# Altium PCB FDD+3s.PcbDoc
Units mm, origin at the board's own origin, x right, y up, seen from the top; angles counter-clockwise.
Board outline 101.6 x 73.66 mm, 2 copper layers (Top, Bottom), stack 1.67 mm thick; 38 components, 95 nets, 309 pads, 0 vias.
Unrouted connection lines stored in the file: 180.
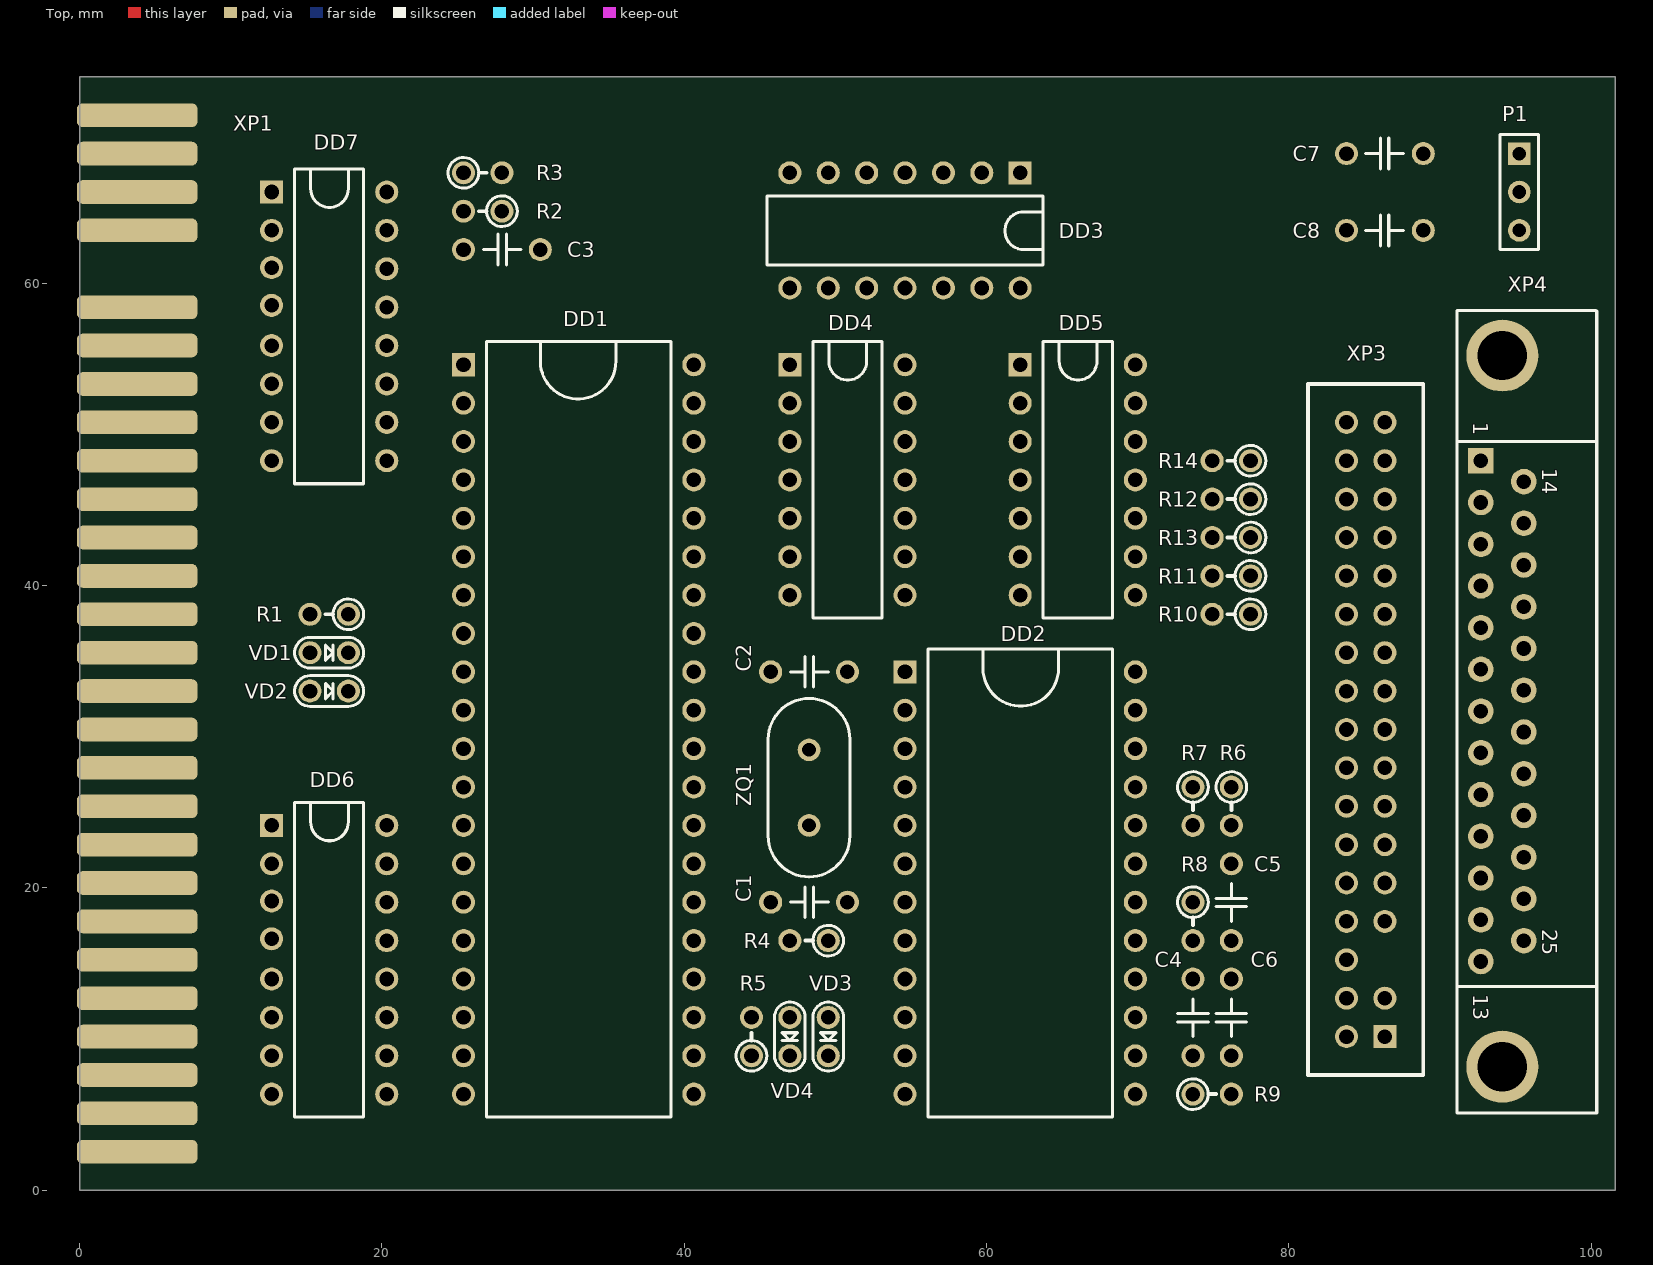
[diagram p0: Top view]
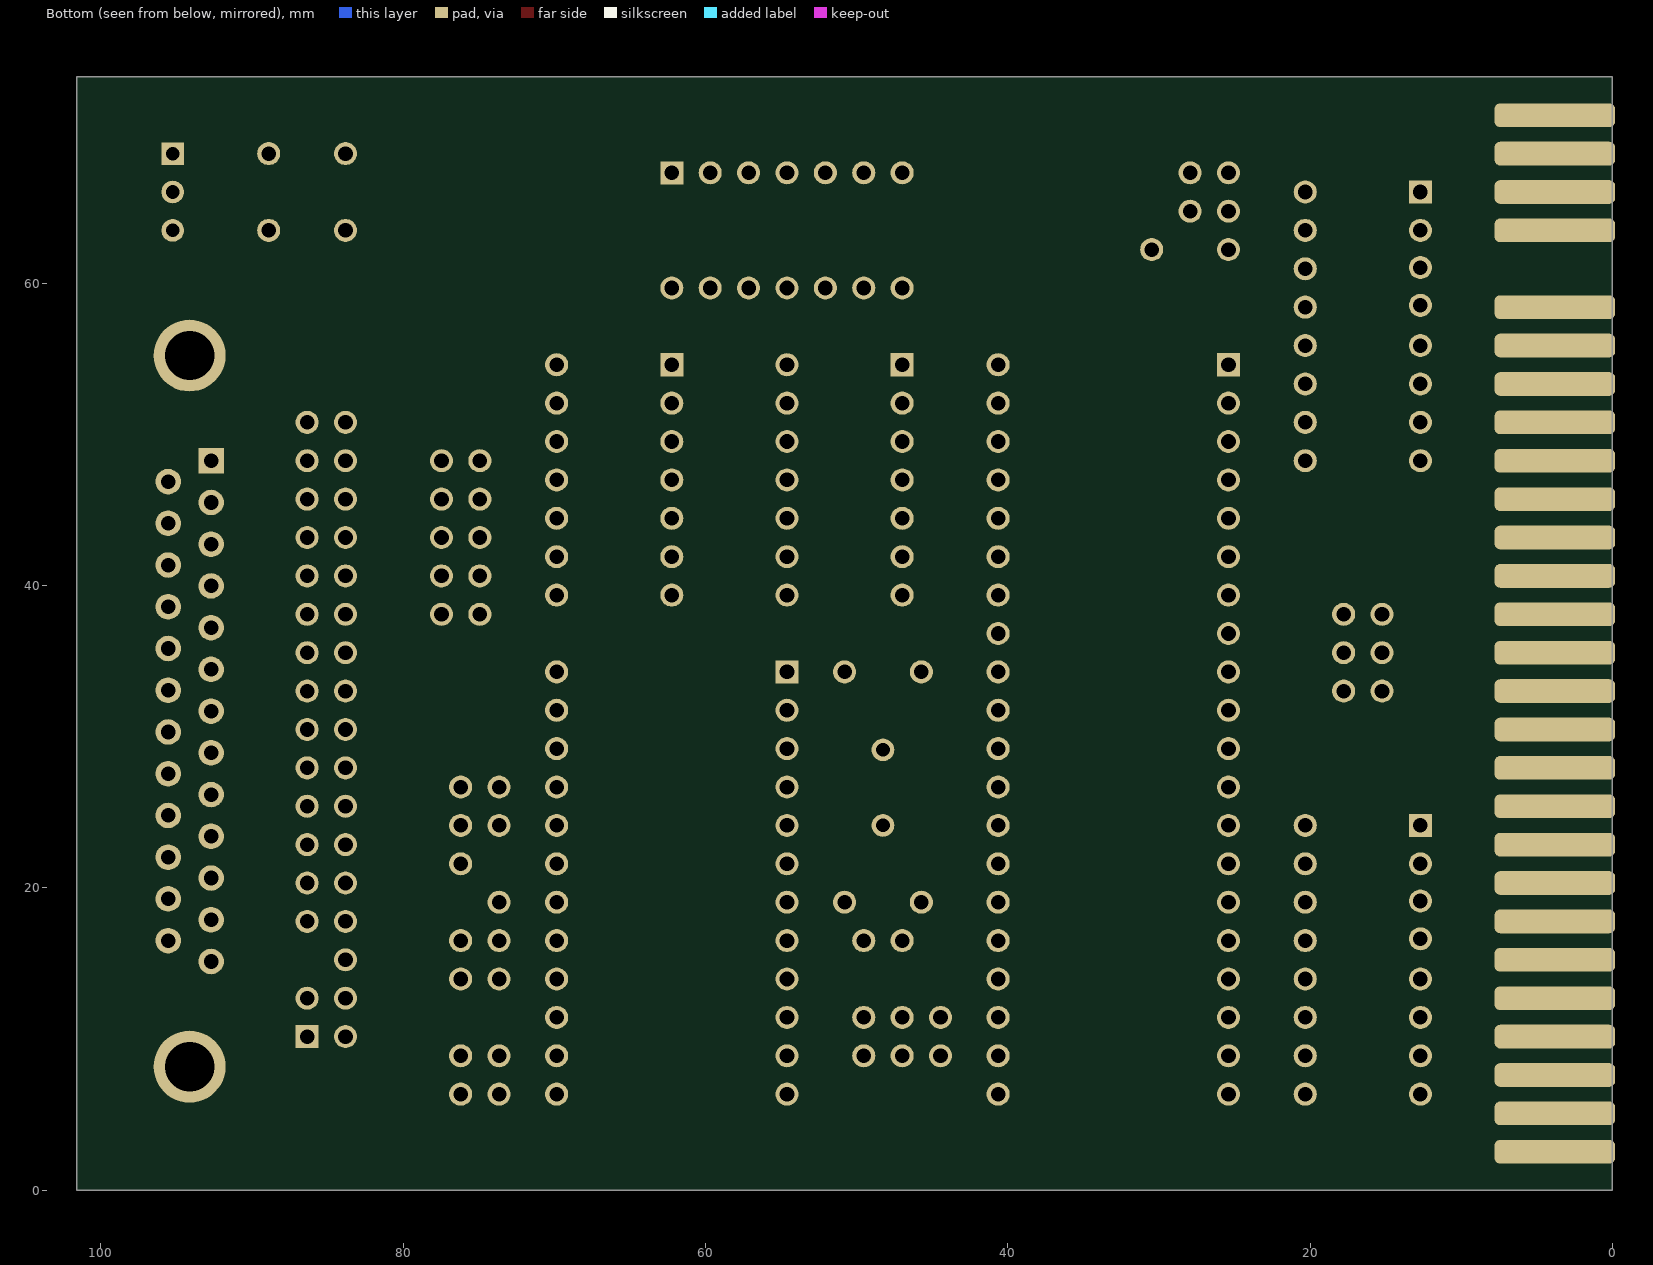
[diagram p1: Bottom view, seen from below]

## Layer stack, top to bottom
Top Solder: solder mask 0.01, Solder Resist, Dk 3.5
Top: signal copper 0.035
Dielectric 1: dielectric 1.6, FR-4, Dk 4.8
Bottom: signal copper 0.035
Bottom Solder: solder mask 0.01, Solder Resist, Dk 3.5

## Board outline
0,73.66 101.6,73.66 101.6,0 0,0

## Design rules (kind name [scope] priority, off if disabled: settings)
Clearance [All] p1: gap=0.2 except(0.5: Arc-Poly Track-Poly SMDPad-Poly THPad-Poly Via-Poly Fill-Poly Poly-Poly)
ComponentClearance DG126 [HasFootprint('DG126') vs HasFootprint('DG126')] p1: gap=-1 collisioncheckmode=3 verticalgap=0.2 showdistances=FALSE
ComponentClearance [All] p2: gap=0.3 collisioncheckmode=3 verticalgap=0.2 showdistances=FALSE
HoleSize [All] p1: absolutevalues=TRUE maxlimit=6.3 minlimit=0.2 maxpercent=80.000 minpercent=20.000
HoleToHoleClearance [All] p1: gap=0.4 allowstackedmicrovias=TRUE
MinimumSolderMaskSliver [All] p1: minsoldermaskwidth=0.1
PlaneConnect Via_Plane_Connect [(ObjectKind = 'Via')] p1: planeconnectstyle=Direct reliefexpansion=0.508 reliefentries=4 reliefconductorwidth=0.254 reliefairgap=0.254
PlaneConnect [All] p2: planeconnectstyle=Relief reliefexpansion=0.508 reliefentries=4 reliefconductorwidth=0.254 reliefairgap=0.254
PolygonConnect Via_Poly_Connect [(ObjectKind = 'Via')] p1: connectstyle=Direct reliefconductorwidth=0.254 reliefentries=4 polygonreliefangle="90 Angle" airgapwidth=0.254
PolygonConnect [All] p2: connectstyle=Relief reliefconductorwidth=0.254 reliefentries=4 polygonreliefangle="90 Angle" airgapwidth=0.254
RoutingVias [All] p1: holewidth=0.6 width=1 viastyle="Through Hole" minholewidth=0.3 minwidth=0.6 maxholewidth=1.6 maxwidth=2
SilkToSilkClearance [All] p1: silktosilkclearance=0.1
SilkToSolderMaskClearance [IsPad] p1: minsilkscreentomaskgap=0.1 clearancetoexposedcopper=TRUE
SolderMaskExpansion [All] p1: expansion=0.102
Width [All] p1: maxlimit=0.6 minlimit=0.3 preferedwidth=0.4 minimp=50.000000 maximp=50.000000 favimp=50.000000
23 further rules are at their usual default settings.

## Components (designator, comment, footprint, x,y, rotation, side; value= is the part's Value field where it differs from the comment)
C1 "K10-17_75" K10-17_75 50.8,19.05 r180 top
C2 "K10-17_75" K10-17_75 50.8,34.29 r180 top
C3 "K10-17_75" K10-17_75 30.48,62.23 r180 top
C4 "K10-17_75" K10-17_75 73.66,8.89 r90 top
C5 "K10-17_75" K10-17_75 76.2,16.51 r90 top
C6 "K10-17_75" K10-17_75 76.2,8.89 r90 top
C7 "K10-17_75" K10-17_75 83.82,68.58 r0 top
C8 "K10-17_75" K10-17_75 83.82,63.5 r0 top
DD1 "UPD765" DIP40_15 25.4,54.61 r0 top
DD2 "SED9420" DIP24_15 54.61,34.29 r0 top
DD3 "1533LN1" DIP14 62.23,67.31 r270 top
DD4 "1533LA3" DIP14 46.99,54.61 r0 top
DD5 "1533LN1" DIP14 62.23,54.61 r0 top
DD6 "1533ID7" DIP16 12.7,24.13 r0 top
DD7 "1533TM8" DIP16 12.7,66.04 r0 top
P1 "Power" HDR1X3 95.25,68.58 r270 top
R1 "R0125-2_5" R0125-2_5 15.24,38.1 r0 top
R2 "R0125-2_5" R0125-2_5 25.4,64.77 r0 top
R3 "R0125-2_5" R0125-2_5 27.94,67.31 r180 top
R4 "R0125-2_5" R0125-2_5 46.99,16.51 r0 top
R5 "R0125-2_5" R0125-2_5 44.45,11.43 r270 top
R6 "R0125-2_5" R0125-2_5 76.2,24.13 r90 top
R7 "R0125-2_5" R0125-2_5 73.66,24.13 r90 top
R8 "R0125-2_5" R0125-2_5 73.66,16.51 r90 top
R9 "R0125-2_5" R0125-2_5 76.2,6.35 r180 top
R10 "R0125-2_5" R0125-2_5 74.93,38.1 r0 top
R11 "R0125-2_5" R0125-2_5 74.93,40.64 r0 top
R12 "R0125-2_5" R0125-2_5 74.93,45.72 r0 top
R13 "R0125-2_5" R0125-2_5 74.93,43.18 r0 top
R14 "R0125-2_5" R0125-2_5 74.93,48.26 r0 top
VD1 "KD522-2_5" KD522-2_5 15.24,35.56 r0 top
VD2 "KD522-2_5" KD522-2_5 15.24,33.02 r0 top
VD3 "KD522-2_5" KD522-2_5 49.53,11.43 r270 top
VD4 "KD522-2_5" KD522-2_5 46.99,11.43 r270 top
XP1 "ZX EDGE" ZX_EDGE 3.81,71.12 r0 top
XP3 "FDD_CON" FDD_CON_Male 86.36,10.16 r180 top
XP4 "FDD_DB25" DSUB1.385-2H25A 92.71,48.26 r270 top
ZQ1 "RK169MD" RK169MD 48.26,24.13 r90 top

## Footprints (in the part's own frame and the unit in brackets; to place one, negate y for a bottom-side part, rotate by r counter-clockwise, add the part's x,y. Pads: shape width x height; smd on the part's side, far side on the other; paste and mask are expansions set on the pad)
DIP14 [mil]
  rect 60x60 hole 38: 1(0,0)
  round 60 hole 38: 2(0,-100) 3(0,-200) 4(0,-300) 5(0,-400) 6(0,-500) 7(0,-600) 8(300,-600) 9(300,-500) 10(300,-400) 11(300,-300) 12(300,-200) 13(300,-100) 14(300,0)
  silkscreen extent 60,-660 240,60
DIP16 [mil]
  rect 60x60 hole 38: 1(0,0)
  round 60 hole 38: 2(0,-100) 3(0,-196.85) 4(0,-295.28) 5(0,-400) 6(0,-500) 7(0,-600) 8(0,-700) 9(300,-700) 10(300,-600) 11(300,-500) 12(300,-400) 13(300,-300) 14(300,-200) 15(300,-100) 16(300,0)
  silkscreen extent 60,-760 240,60
DIP24_15 [mil]
  rect 60x60 hole 38: 1(0,0)
  round 60 hole 38: 2(0,-100) 3(0,-200) 4(0,-300) 5(0,-400) 6(0,-500) 7(0,-600) 8(0,-700) 9(0,-800) 10(0,-900) 11(0,-1000) 12(0,-1100) 13(600,-1100) 14(600,-1000) 15(600,-900) 16(600,-800) 17(600,-700) 18(600,-600) 19(600,-500) 20(600,-400) 21(600,-300) 22(600,-200) 23(600,-100) 24(600,0)
  silkscreen extent 60,-1160 540,60
DIP40_15 [mil]
  rect 60x60 hole 38: 1(0,0)
  round 60 hole 38: 2(0,-100) 3(0,-200) 4(0,-300) 5(0,-400) 6(0,-500) 7(0,-600) 8(0,-700) 9(0,-800) 10(0,-900) 11(0,-1000) 12(0,-1100) 13(0,-1200) 14(0,-1300) 15(0,-1400) 16(0,-1500) 17(0,-1600) 18(0,-1700) 19(0,-1800) 20(0,-1900) 21(600,-1900) 22(600,-1800) 23(600,-1700) 24(600,-1600) 25(600,-1500) 26(600,-1400) 27(600,-1300) 28(600,-1200) 29(600,-1100) 30(600,-1000) 31(600,-900) 32(600,-800) 33(600,-700) 34(600,-600) 35(600,-500) 36(600,-400) 37(600,-300) 38(600,-200) 39(600,-100) 40(600,0)
  silkscreen extent 60,-1960 540,60
DSUB1.385-2H25A [mm] "Connector; D Subminiature; 25 Position; Right Angle; Pitch 1.385 mm"
  rect 1.69x1.69 hole 0.965: 1(0,0)
  round 1.69 hole 0.965: 2(2.761,0) 3(5.522,0) 4(8.283,0) 5(11.044,0) 6(13.805,0) 7(16.566,0) 8(19.327,0) 9(22.088,0) 10(24.849,0) 11(27.61,0) 12(30.371,0) 13(33.132,0) 14(1.381,2.84) 15(4.142,2.84) 16(6.903,2.84) 17(9.664,2.84) 18(12.424,2.84) 19(15.185,2.84) 20(17.946,2.84) 21(20.707,2.84) 22(23.469,2.84) 23(26.23,2.84) 24(28.991,2.84) 25(31.752,2.84)
  round 4.76 hole 3.26: 26(-6.96,1.42) 27(40.092,1.42)
  silkscreen extent -9.93,-1.58 43.17,7.67
FDD_CON_Male [mil]
  rect 60x60 hole 37.99: 1(0,0)
  round 60 hole 37.99: 2(100,0) 3(0,-100) 4(100,-100) 6(100,-200) 7(0,-300) 8(100,-300) 9(0,-400) 10(100,-400) 11(0,-500) 12(100,-500) 13(0,-600) 14(100,-600) 15(0,-700) 16(100,-700) 17(0,-800) 18(100,-800) 19(0,-900) 20(100,-900) 21(0,-1000) 22(100,-1000) 23(0,-1100) 24(100,-1100) 25(0,-1200) 26(100,-1200) 27(0,-1300) 28(100,-1300) 29(0,-1400) 30(100,-1400) 31(0,-1500) 32(100,-1500) 33(0,-1600) 34(100,-1600)
  silkscreen extent -100,-1700 200,100
HDR1X3 [mm] "Connector; Header; 3 Position"
  rect 1.5x1.5 hole 0.9: 1(0,0)
  round 1.5 hole 0.9: 2(2.54,0) 3(5.08,0)
  silkscreen extent -1.27,-1.27 6.35,1.27
K10-17_75 [mil]
  round 60 hole 38: 1(0,0) 2(200,0)
  silkscreen extent 50,-40 148,40
KD522-2_5 [mil]
  round 60 hole 38: 1(0,0) 2(100,0)
  silkscreen extent -40,-40 140,40
R0125-2_5 [mil]
  round 60 hole 38: 1(0,0) 2(100,0)
  silkscreen extent 40,-40 140,40
RK169MD [mm]
  round 1.5 hole 0.9: 1(0,0) 2(5,0)
  silkscreen extent -3.4,-2.7 8.4,2.7
ZX_EDGE [mm]
  rrect50% 8x1.57 smd far side: 1(0,0) 2(0,-2.54) 3(0,-5.08) 4(0,-7.62) 6(0,-12.7) 7(0,-15.24) 8(0,-17.78) 9(0,-20.32) 10(0,-22.86) 11(0,-25.4) 12(0,-27.94) 13(0,-30.48) 14(0,-33.02) 15(0,-35.56) 16(0,-38.1) 17(0,-40.64) 18(0,-43.18) 19(0,-45.72) 20(0,-48.26) 21(0,-50.8) 22(0,-53.34) 23(0,-55.88) 24(0,-58.42) 25(0,-60.96) 26(0,-63.5) 27(0,-66.04) 28(0,-68.58)
  rrect50% 8x1.57 smd: 29(0,0) 30(0,-2.54) 31(0,-5.08) 32(0,-7.62) 34(0,-12.7) 35(0,-15.24) 36(0,-17.78) 37(0,-20.32) 38(0,-22.86) 39(0,-25.4) 40(0,-27.94) 41(0,-30.48) 42(0,-33.02) 43(0,-35.56) 44(0,-38.1) 45(0,-40.64) 46(0,-43.18) 47(0,-45.72) 48(0,-48.26) 49(0,-50.8) 50(0,-53.34) 51(0,-55.88) 52(0,-58.42) 53(0,-60.96) 54(0,-63.5) 55(0,-66.04) 56(0,-68.58)

## Part data
P1: library part "Header 3", "Header, 3-Pin"

## Nets (pads, with @x,y where several pads share a name; then routed paths per layer and width w, separated by ;. In a path a pad name is that pad's centre, name@x,y a point inside that pad or via, vN(x,y) a via of type N, cw(c..) or ccw(c..) an arc to the next point about the centre after c; other vN are vias at no path point)
1FFD: DD6.15 DD7.9
+5V: C8.2 DD1.15 DD1.40 DD2.10 DD2.11 DD2.24 DD3.14 DD4.14 DD5.14 DD6.16 DD7.16 P1.3 R5.2 R10.1 R11.1 R12.1 R13.1 R14.1 XP1.3 XP4.5 XP4.6
+12V: C7.2 P1.1 XP1.4 XP1.50 XP4.1 XP4.2
-12V: XP1.51
A0: XP1.9
A1: VD1.1 XP1.10
A2: XP1.11
A3: XP1.12
A4: XP1.24
A5: XP1.23
A6: XP1.22
A7: XP1.21
A8: XP1.54
A9: XP1.27
A10: XP1.55
A11: XP1.28
A12: DD1.5 XP1.2
A13: DD6.1 XP1.30
A14: DD6.2 XP1.1
A15: VD2.1 XP1.29
BUSAK: XP1.26
BUSRQ: XP1.19
CLKB: XP1.8
D0: DD1.6 DD7.4 XP1.34
D1: DD1.7 DD7.5 XP1.35
D2: DD1.8 DD7.12 XP1.36
D3: DD1.9 DD7.13 XP1.39
D4: DD1.10 XP1.40
D5: DD1.11 XP1.38
D6: DD1.12 XP1.37
D7: DD1.13 XP1.31
F_DIR: DD3.8 XP3.18 XP4.21
F_DS0: DD7.14 XP3.10 XP3.16 XP4.22 XP4.25
F_DS1: DD3.11 DD3.12 R3.1 XP3.12 XP4.24
F_DS2: DD3.10 XP3.14 XP4.23
F_DS3: XP3.6
F_INDEX: DD5.1 R10.2 XP3.8 XP4.13
F_MODE: XP3.2 XP4.12
F_RD: DD4.1 DD4.2 R12.2 XP3.30 XP4.15
F_READY: DD5.3 R14.2 XP3.34
F_SIDE: DD5.12 XP3.32 XP4.14
F_STEP: DD4.6 XP3.20 XP4.20
F_TR00: DD5.11 R11.2 XP3.26 XP4.17
F_WD: DD3.4 XP3.22 XP4.19
F_WG: DD3.6 XP3.24 XP4.18
F_WP: DD5.5 R13.2 XP3.28 XP4.16
GND: C1.2 C2.2 C3.1 C4.1 C7.1 C8.1 DD1.4 DD1.16 DD1.20 DD2.12 DD2.13 DD3.7 DD4.7 DD4.12 DD4.13 DD5.7 DD6.8 DD7.8 P1.2 R1.1 R9.2 XP1.6 XP1.7 XP1.14 XP3.1 XP3.3 XP3.7 XP3.9 XP3.11 XP3.13 XP3.15 XP3.17 XP3.19 XP3.21 XP3.23 XP3.25 XP3.27 XP3.29 XP3.31 XP3.33 XP4.3 XP4.4 XP4.7 XP4.8 XP4.9 XP4.10 XP4.11
HALT: XP1.43
HC1: XP1.48
INT: XP1.41
IORQ: DD6.5 XP1.45
IRQULA: XP1.13
M1: DD6.6 XP1.52
MREQ: XP1.44
NetC1_1: C1.1 DD2.2 R4.2 ZQ1.1
NetC2_1: C2.1 DD2.1 R4.1 ZQ1.2
NetC3_2: C3.2 DD1.1 R2.1 R3.2
NetC4_2: C4.2 DD2.15
NetC5_1: C5.1 C6.2 DD2.14 R7.1 R8.1
NetC5_2: C5.2 R6.1
NetC6_1: C6.1 R9.1
NetDD1_2: DD1.2 DD6.10
NetDD1_3: DD1.3 DD6.14
NetDD1_17: DD1.17 DD5.2
NetDD1_18: DD1.18 VD3.2
NetDD1_19: DD1.19 DD2.3
NetDD1_21: DD1.21 DD2.19
NetDD1_22: DD1.22 DD2.8
NetDD1_23: DD1.23 DD2.9
NetDD1_24: DD1.24 DD2.6 VD4.2
NetDD1_25: DD1.25 DD3.5
NetDD1_27: DD1.27 DD5.13
NetDD1_29: DD1.29 DD3.13
NetDD1_30: DD1.30 DD3.3
NetDD1_33: DD1.33 DD5.8
NetDD1_34: DD1.34 DD5.6
NetDD1_35: DD1.35 DD5.4
NetDD1_37: DD1.37 DD4.5
NetDD1_38: DD1.38 DD3.9
NetDD1_39: DD1.39 DD4.4 DD4.10
NetDD2_5: DD2.5 R5.1 VD3.1 VD4.1
NetDD2_7: DD2.7 DD4.3
NetDD2_16: DD2.16 R8.2
NetDD2_17: DD2.17 R6.2 R7.2
NetDD3_2: DD3.2 R2.2
NetDD4_8: DD4.8 DD5.9
NetDD4_9: DD4.9 DD5.10
NetDD6_4: DD6.4 R1.2 VD1.2 VD2.2
NMI: XP1.42
RD: XP1.46
RESET: DD3.1 DD7.1 XP1.20
RFSH: XP1.53
ROMCS: XP1.25
WAIT: XP1.49
WR: DD6.3 XP1.47
pads on no net: DD1.14 DD1.26 DD1.28 DD1.31 DD1.32 DD1.36 DD2.4 DD2.18 DD2.20 DD2.21 DD2.22 DD2.23 DD4.11 DD6.7 DD6.9 DD6.11 DD6.12 DD6.13 DD7.2 DD7.3 DD7.6 DD7.7 DD7.10 DD7.11 DD7.15 XP1.15 XP1.16 XP1.17 XP1.18 XP1.32 XP1.56 XP3.4 XP4.26 XP4.27

## Text inside footprints (layer, text, board x,y; h text height)
XP4: Top Overlay "1" at 92.202,50.8 h1 r270; Top Overlay "13" at 92.202,12.954 h1 r270; Top Overlay "14" at 96.774,47.752 h1 r270; Top Overlay "25" at 96.774,17.272 h1 r270